# EAGLE board clvHd (EAGLE 9.6.2)
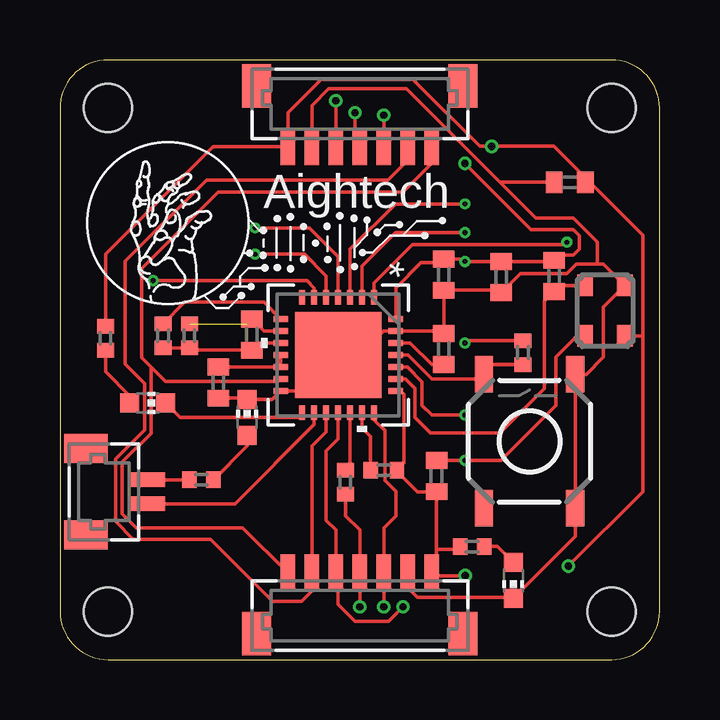
[diagram p0: board, top side]
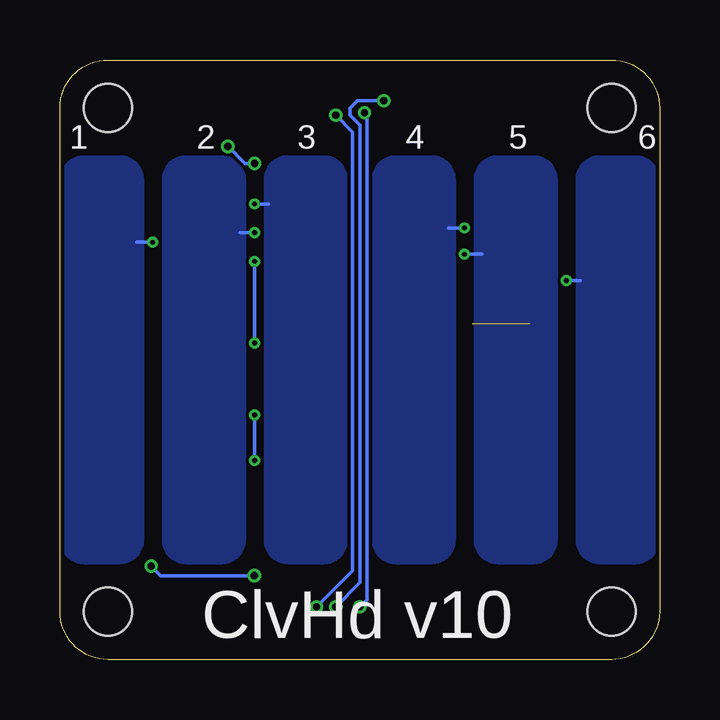
[diagram p1: board, bottom side, seen from below]

Size 25 x 25 mm. Coordinates in mm from the lower left corner, seen from the top.
Outline: 2,25 1.83,24.99 arc85 0,23 0,2 arc90 2,0 23,0 23.17,0.01 arc85 25,2 25,23 24.99,23.17 arc85 23,25 2,25
Copper layers (1*16): Top 0.035mm / dielectric 1.5mm / Bottom 0.035mm
Design rules "SparkFun-2-Layer-Minimum-JLCPCB *": minimum track width 5mil, minimum drill 0.2mm, track to track 5mil, track to pad 5mil, pad to pad 5mil, via to via 5mil, smd to smd 5mil, copper to edge 7mil, drill to drill 7mil, minimum pad ring 5mil, minimum via ring 5mil, stop-mask expansion 2.5mil, vias tented up to drill 25mil, thermal gap 10mil
Holes 2 mm at 2,2 23,2 2,23 23,23

## Footprints (pad centres in the part's own frame; a part is rotated, then mirrored left to right if it is on the bottom)
C0402 = smd 0.7 x 0.9: 1 -0.65,0; 2 0.65,0
CHIP-LED0603 = smd 0.8 x 0.8: A 0,-0.75; C 0,0.75
R0402 = smd 0.6 x 0.7: 1 -0.5,0; 2 0.5,0
R0402' = smd 0.6 x 0.7: 1 -0.55,0; 2 0.55,0
TACTILE-SWITCH-SMD = smd 1.524 x 0.762: 1 -2.794,1.905; 2 2.794,1.905; 3 -2.794,-1.905; 4 2.794,-1.905
RSG28_3P6X3P6_TEX = smd 0.6 x 0.25: 1 -2.4,1.5; 2 -2.4,1; 3 -2.4,0.5; 4 -2.4,0; 5 -2.4,-0.5; 6 -2.4,-1; 7 -2.4,-1.5; 15 2.4,-1.5; 16 2.4,-1; 17 2.4,-0.5; 18 2.4,0; 19 2.4,0.5; 20 2.4,1; 21 2.4,1.5 | smd 0.25 x 0.6: 8 -1.5,-2.4; 9 -1,-2.4; 10 -0.5,-2.4; 11 0,-2.4; 12 0.5,-2.4; 13 1,-2.4; 14 1.5,-2.4; 22 1.5,2.4; 23 1,2.4; 24 0.5,2.4; 25 0,2.4; 26 -0.5,2.4; 27 -1,2.4; 28 -1.5,2.4 | smd 3.6 x 3.6: 29 0,0
SMD-3225_4P = smd 0.9 x 0.65: 1 -1.05,-0.825; 2 1.05,-0.825; 3 1.05,0.825; 4 -1.05,0.825
BM02B-SRSS-TB = smd 0.6 x 1.55: 1 0.5,0; 2 -0.5,0 | smd 1.2 x 1.8: M1 1.8,-2.525; M2 -1.8,-2.525
BM07B-SRSS-TB = smd 0.6 x 1.55: 1 3,0; 2 2,0; 3 1,0; 4 0,0; 5 -1,0; 6 -2,0; 7 -3,0 | smd 1.2 x 1.8: M1 4.3,-2.525; M2 -4.3,-2.525

## Placement (x,y rotation side)
C9  22pF  [C0402]  15.7,7.65 90 top
C10  22pF  [C0402]  20.6,16 270 top
C11  1nF  [C0402]  8,13.55 90 top
C12  100nF  [C0402]  6.6,11.55 270 top
C13  100nF  [C0402]  18.4,15.95 270 top
C16  100nF  [C0402]  16,16.05 270 top
C19  100nF  [C0402]  21.25,19.9 180 top
C20  1uF  [C0402]  16,12.95 90 top
L1  LED 0603  [CHIP-LED0603]  18.9,3.3 180 top
L2  LED 0603  [CHIP-LED0603]  3.66,10.7 270 top
L3  LED 0603  [CHIP-LED0603]  7.8,10.1 0 top
R1  100  [R0402]  5.9,7.5 180 top
R7  100  [R0402]  17.18,4.71 0 top
R10  51  [R0402]  11.9,7.4 270 top
R11  1M  [R0402]  19.3,12.8 90 top
R12  100  [R0402]  1.9,13.4 90 top
R13  1M  [R0402']  13.5,7.9 0 top
R14  10k  [R0402]  4.3,13.5 270 top
R15  10M  [R0402]  5.4,13.5 270 top
S1  TAC_SWITCHSMD  [TACTILE-SWITCH-SMD]  19.58,9.1 90 top
U1  ADS1293CISQ/NOPB  [RSG28_3P6X3P6_TEX]  11.6,12.7 270 top
U$1  C387328  [SMD-3225_4P]  22.73,14.55 90 top
X1  BM02B-SRSS-TB  [BM02B-SRSS-TB]  3.61,7 270 top
X2  BM07B-SRSS-TB  [BM07B-SRSS-TB]  12.5,3.61 0 top
X3  BM07B-SRSS-TB  [BM07B-SRSS-TB]  12.5,21.39 180 top

## Library data of the parts
C9-C13 C16 C19 C20 = rcl; SPICEPREFIX: C
L1-L3 = led
R1 R7 R10-R12 R14 R15 = rcl; SPICEPREFIX: R
R13 = rclCustom; SPICEPREFIX: R
S1 = SparkFun-Retired; PROD_ID: SWCH-08247
U1 = ADS; BUILT_BY: EMA_UL_Team; MANUFACTURER_PART_NUMBER: ADS1293CISQ/NOPB; SOURCELIBRARY: TI_2016-05-20; VENDOR: Texas Instruments
U$1 = crystalCustom; OC_FARNELL: unknown; OC_NEWARK: unknown
X1-X3 = con-JST SH

## Nets
ALARMB: L2.C U1.15
CLK: U1.21 X2.3 X3.3
CMOUT: R14.1 U1.8
CS: U1.16 X1.1
DIN: U1.18 X2.5 X3.5
DOUT: R10.2 X2.4 X3.4
DRDYB: R13.1 U1.20
GND: C12.2 C13.2 C16.2 C19.2 C20.2 L1.C L3.C S1.3 S1.4 U1.14 U1.27 U1.29 U$1.2 X2.2 X3.2
IN1: U1.1
IN2.: U1.2
IN3: U1.3
IN4: U1.4
IN5: U1.5
IN6: U1.6
N$1: R11.1 S1.2 U1.25
N$2: L1.A R7.2
N$3: R10.1 U1.19
N$4: C10.2 U1.23 U$1.3
N$5: R1.2 X1.2
N$6: L2.A R12.1
N$7: L3.A R1.1
N$8: C9.2 U1.24 U$1.4
N$9: C20.1 U1.26
N$15: C11.1 R14.2 R15.2 U1.10
RLDOUT: C11.2 R15.1 U1.9
RLDREF: C12.1 U1.11 U1.12
SCLK: U1.17 X2.6 X3.6
SYNCB: U1.13 X2.7 X3.7
VDD: C9.1 C10.1 C13.1 C16.1 C19.1 R7.1 R11.2 R12.2 R13.2 U1.22 U1.28 U$1.1 X2.1 X3.1
WCT: U1.7

## Tracks (layer width: path | path; a pad name or v marks a point on that pad's centre or on a via)
ALARMB
  Top 0.152: U1.15 10.1,10.2 10,10.1 5.01,10.1 L2.C
CLK  (via drill 0.3)
  Top 0.152: U1.21 13.1,10 13.55,9.55 13.55,7.47 14,7.01 14,6 13.5,5.5 X2.3 v13.5,2.2 | v11.5,23.3 X3.3
  Bottom 0.152: v13.5,2.2 12.48,3.22 12.48,22.28 12.9,22.7 12.9,23 12.6,23.3 v11.5,23.3
CMOUT
  Top 0.152: U1.8 8.5,14.9 5.2,14.9 R14.1
CS
  Top 0.152: U1.16 10.6,9.8 7.3,6.5 X1.1
DIN  (via drill 0.3)
  Top 0.152: v14.3,2.2 13.7,1.6 12.3,1.6 11.6,2.3 11.6,3.51 X2.5 11.5,5.4 11.1,5.8 11.1,8.7 11.6,9.2 U1.18 | v13.5,22.7 X3.5
  Bottom 0.152: v14.3,2.2 12.8,3.7 12.8,22 v13.5,22.7
DOUT  (via drill 0.3)
  Top 0.152: v12.3,22.8 12.3,21.59 X3.4 | v12.5,2.2 X2.4 12.5,5.4 11.9,6 R10.2
  Bottom 0.152: v12.3,22.8 12.2,22.7 12.2,2.5 v12.5,2.2
DRDYB
  Top 0.152: U1.20 12.6,9.65 12.95,9.3 R13.1 13,7.85
GND
  Top 0.152: 22.4,16.5 22.4,17.4 21.4,18.4 19.85,18.4 18.35,19.9 | 18.35,19.9 14.45,23.8 11.2,23.8 10.5,23.1 X3.2 | 6.7,10.8 C12.2 | X2.2 14.5,3 14.9,2.6 18.85,2.6 L1.C 21.48,5.13 S1.3 S1.4 21.94,11.89 22.66,12.61 22.66,14.71 U$1.2 22.65,16.5 22.4,16.5 | 22.4,16.5 21.54,16.5 21.13,16.1 19.2,16.1 C13.2 18.3,15.4 C16.2 C20.2 15.9,13.7 U1.27 13.5,13.71 12.49,12.7 U1.29 10.1,11.2 U1.14 8.85,10.85 L3.C 7.75,10.9 C12.2 | C19.2 18.35,19.9 | 6.55,10.85 C12.2
IN1  (via drill 0.2)
  Top 0.152: U1.1 13.1,15.7 14.7,17.3 21.03,17.3 v21.13,17.4
  Bottom 0.152: v21.13,17.4 21.8,17.4
  pour Bottom: 22.5,21 24,21 arc-90 25,20 25,5 arc-90 24,4 22.5,4 arc-90 21.5,5 21.5,20 arc-90
IN2.  (via drill 0.2)
  Top 0.152: v16.88,17.8 13.99,17.8 12.6,16.41 U1.2
  Bottom 0.152: v16.88,17.8 17.5,17.8
  pour Bottom: 18.25,21 19.75,21 arc-90 20.75,20 20.75,5 arc-90 19.75,4 18.25,4 arc-90 17.25,5 17.25,20 arc-90
IN3  (via drill 0.2)
  Top 0.152: v16.88,19 13.99,19 12.1,17.11 U1.3
  Bottom 0.152: v16.88,19 16.3,19
  pour Bottom: 14,21 15.5,21 arc-90 16.5,20 16.5,5 arc-90 15.5,4 14,4 arc-90 13,5 13,20 arc-90
IN4  (via drill 0.2)
  Top 0.152: U1.4 11.6,16.8 10.4,18 v8.13,18
  Bottom 0.152: v8.13,18 8.8,18
  pour Bottom: 9.5,21 11,21 arc-90 12,20 12,5 arc-90 11,4 9.5,4 arc-90 8.5,5 8.5,20 arc-90
IN5  (via drill 0.2)
  Top 0.152: v8.13,16.9 10.2,16.9 11.1,16 U1.5
  Bottom 0.152: v8.13,16.9 7.4,16.9
  pour Bottom: 5.25,21 6.75,21 arc-90 7.75,20 7.75,5 arc-90 6.75,4 5.25,4 arc-90 4.25,5 4.25,20 arc-90
IN6  (via drill 0.2)
  Top 0.152: U1.6 10.6,15.5 10.3,15.8 v3.88,15.8
  Bottom 0.152: v3.88,15.8 3.3,15.8
  pour Bottom: 1,21 2.5,21 arc-90 3.5,20 3.5,5 arc-90 2.5,4 1,4 arc-90 0,5 0,20 arc-90
N$1
  Top 0.152: U1.25 14.5,12.7 15.5,11.7 17.48,11.7 S1.2 18.08,12.3 R11.1
N$2
  Top 0.152: L1.A 18.24,4.71 R7.2
N$3
  Top 0.152: U1.19 12.1,8.1 R10.1
N$4
  Top 0.152: U1.23 14.4,11.7 14.8,11.3 14.8,10.1 15.45,9.45 18.35,9.45 20.2,11.3 20.2,14.95 C10.2 20.85,15.6 U$1.3
N$5
  Top 0.152: X1.2 R1.2
N$6
  Top 0.152: R12.1 1.9,12.01 2.91,11 L2.A
N$7
  Top 0.152: L3.A 7.8,8.9 R1.1
N$8  (via drill 0.2)
  Top 0.152: U1.24 14.48,12.2 15.1,11.58 15.1,10.6 15.5,10.2 v16.88,10.2 | C9.2 v16.88,8.3 18.39,8.3 20.68,10.58 20.68,12.62 21.56,13.5 U$1.4
  Bottom 0.152: v16.88,10.2 v16.88,8.3
N$9
  Top 0.152: U1.26 14.6,13.2 15.5,12.3 C20.1
N$15
  Top 0.152: U1.10 8.3,13.2 C11.1 5.5,12.9 R15.2 R14.2
RLDOUT  (1 unrouted)
  Top 0.152: U1.9 8.5,13.7 C11.2 7.8,14
RLDREF
  Top 0.152: U1.11 U1.12 C12.1
SCLK
  Top 0.152: X3.6 14.5,20.83 13.67,20 6.11,20 2.72,16.62 2.72,12.32 3.52,11.52 3.52,9.57 2.32,8.37 2.32,5.76 3.06,5.02 6.28,5.02 8.87,2.43 10.07,2.43 10.5,2.86 X2.6 10.5,8.9 11.1,9.5 U1.17
SYNCB
  Top 0.152: X3.7 15.5,20.7 14.3,19.5 6.6,19.5 3.4,16.3 3.4,12.6 3.81,12.19 | X2.7 7.61,5.5 3.17,5.5 2.6,6.07 2.6,8.23 3.81,9.44 3.81,12.19 | U1.13 9.1,11.6 4.4,11.6 3.81,12.19
VDD  (via drill 0.2, 0.3)
  Top 0.152: U1.28 14,15.5 15.05,16.55 15.85,16.55 C16.1 16.78,16.7 v16.88,16.6 C13.1 20.55,16.6 C10.1 20.6,16.87 21.41,16.87 21.66,17.12 21.66,17.68 21.41,17.93 19.64,17.93 v16.89,20.69 | 24.3,13.49 24.3,17.7 22.09,19.9 C19.1 21.9,20.09 20.59,21.4 v18,21.4 17.5,21.4 14.7,24.2 10.9,24.2 9.5,22.8 X3.1 6.39,21.39 1.9,16.9 R12.2 | 24.3,13.49 24.3,7 v21.2,3.9 | v16.9,3.5 15.7,3.5 | X2.1 15.61,3.5 15.7,3.5 | R7.1 16.57,4.6 15.7,4.6 | U1.22 14.2,11.2 14.35,11.05 14.35,8.2 R13.2 14.05,7.85 14.9,7 C9.1 15.7,4.6 | 15.7,4.6 15.7,3.5 | v16.88,13.2 16.98,13.3 R11.2 | U$1.1 24.3,13.5 24.3,13.49
  Bottom 0.152: v21.2,3.9 20.8,3.5 v16.9,3.5 | v18,21.4 17.29,20.69 v16.89,20.69 | v16.88,13.2 v16.88,16.6

## Text on the board
tNames: Aightech
bNames: 6 | 5 | 4 | 3 | 2 | 1 | ClvHd v10